# EAGLE board big (EAGLE 7.2.0), part 1 of 2
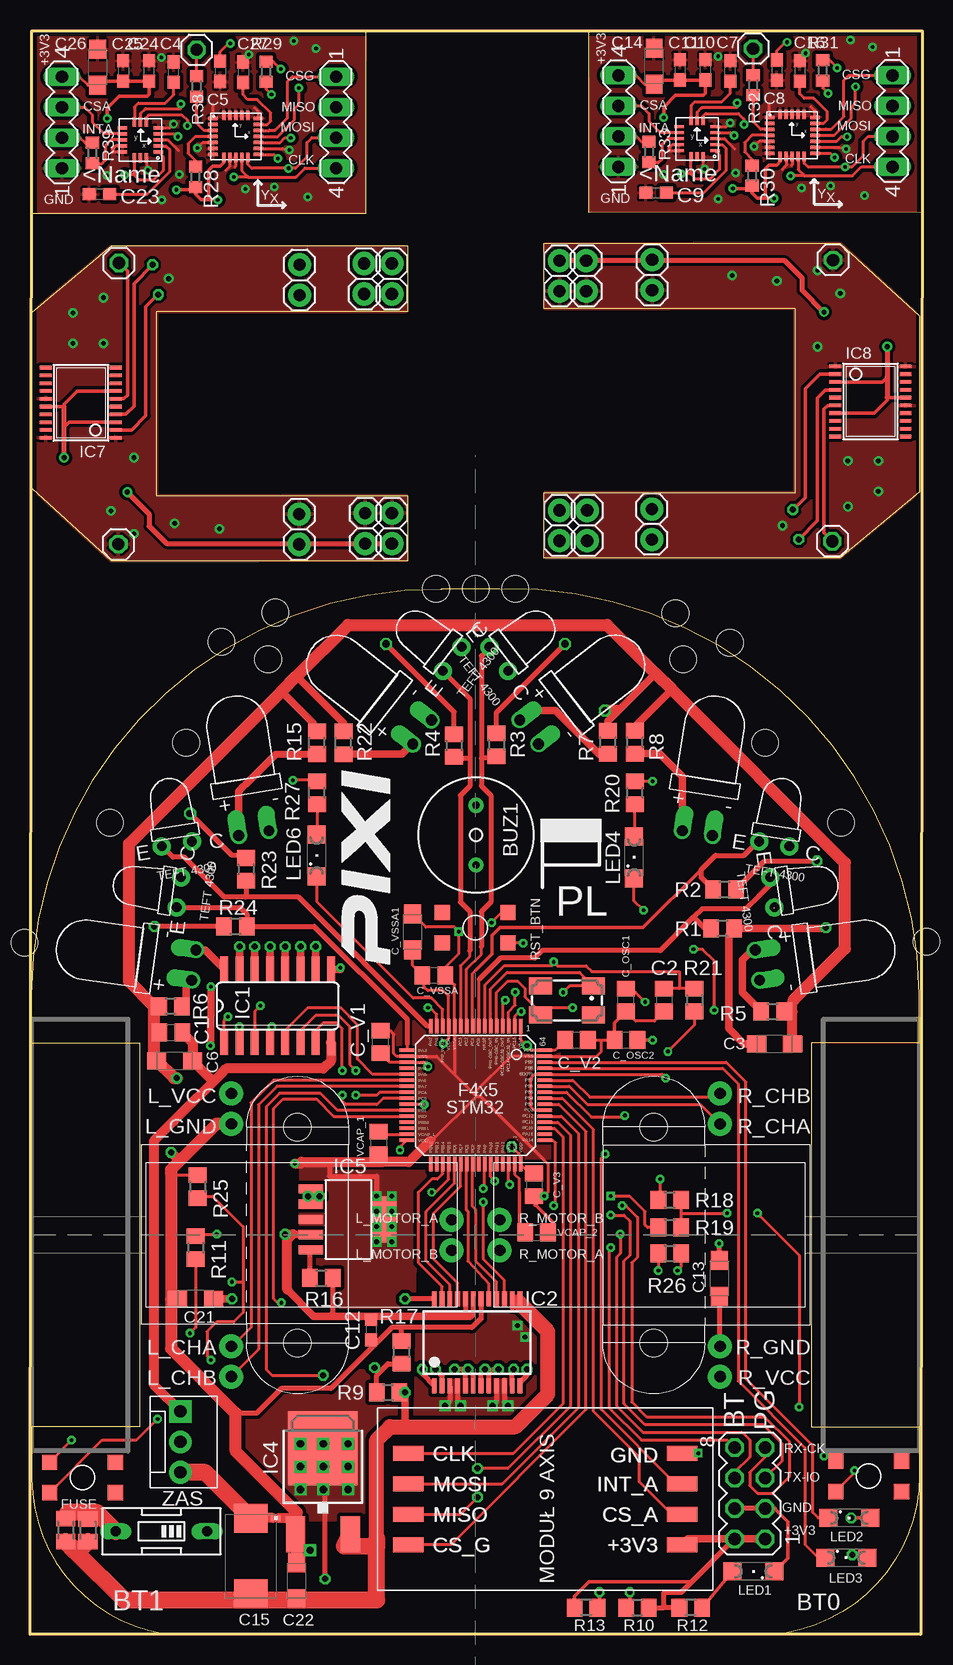
[diagram p0: board, top side]
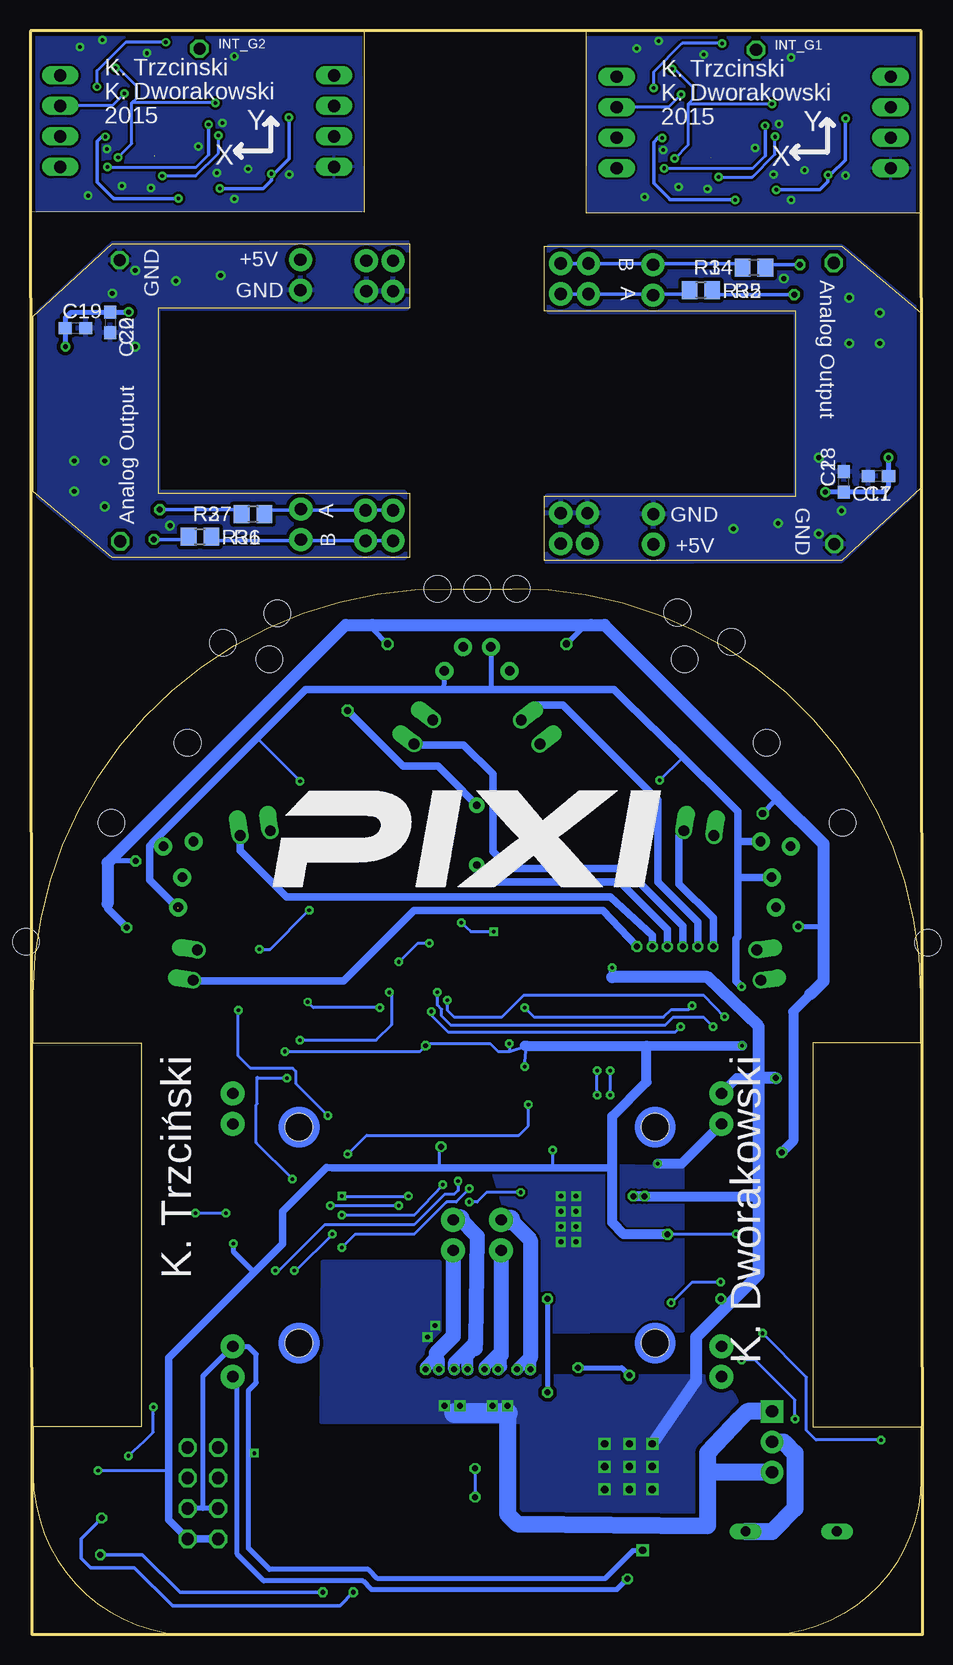
[diagram p1: board, bottom side, seen from below]

Size 74.43 x 133.79 mm. Coordinates in mm from the lower left corner, seen from the top.
Outline: 13.55,0 60.65,0
Outline: 0.15,110.21 0.15,95.6
Outline: 28.03,133.69 0.17,133.69
Outline: 74.17,95.33 74.17,109.93
Outline: 74.43,133.79 46.57,133.79
Outline: 0,0.05 0.13,133.71 74.4,133.71 74.27,0.05 0,0.05
Copper layers (1*16): Top 0.035mm / dielectric 1.5mm / Bottom 0.035mm
Design rules "default *": minimum track width 8mil, minimum drill 0.3mm, track to track 8mil, track to pad 8mil, pad to pad 7mil, via to via 8mil, smd to smd 0mil, copper to edge 12mil, drill to drill 8mil, minimum pad ring 10mil, minimum via ring 8mil, stop-mask expansion 4mil, vias tented up to drill 0mil, thermal gap 8mil
Holes 2.2 mm at 19.85,81.34 13.02,74.36 6.67,67.69 54.46,81.34 61.28,74.36 67.63,67.69 20.45,85.22 15.95,82.8 -0.45,57.7 53.81,85.15 58.35,82.7 74.75,57.8 37.15,87.2 33.85,87.2 40.45,87.2
Milling: 33 lines

## Footprints (pad centres in the part's own frame; a part is rotated, then mirrored left to right if it is on the bottom)
7914G = smd 1.27 x 1.27: 1 0,0; 2 0,5.486; 3 2.54,0; 4 2.54,5.486
BUZZER-9.5MM = drill 0.6 pad 1.27: + -2.481,0; - 2.499,0
C0805 = smd 1.3 x 1.5: 1 -0.95,0; 2 0.95,0
SMC_A = smd 1.6 x 1.4: + -1.5,0; - 1.5,0
C0603 = smd 1.1 x 1: 1 -0.85,0; 2 0.85,0
SMC_D = smd 2.4 x 2.8: + -3.15,0; - 3.15,0
SFH4545-C = drill 0.9 offset: ANODA -1.27,-0.76; KATODA 1.27,-0.76
M2012 = smd 1.3 x 1.6: 1 -0.95,0; 2 0.95,0
SO16 = smd 0.66 x 2.032: 1 -4.445,-3.073; 2 -3.175,-3.073; 3 -1.905,-3.073; 4 -0.635,-3.073; 5 0.635,-3.073; 6 1.905,-3.073; 7 3.175,-3.073; 8 4.445,-3.073; 9 4.445,3.073; 10 3.175,3.073; 11 1.905,3.073; 12 0.635,3.073; 13 -0.635,3.073; 14 -1.905,3.073; 15 -3.175,3.073; 16 -4.445,3.073
SSOP24 = smd 0.4 x 1.25: 1 -3.575,-3.625; 2 -2.925,-3.625; 3 -2.275,-3.625; 4 -1.625,-3.625; 5 -0.975,-3.625; 6 -0.325,-3.625; 7 0.325,-3.625; 8 0.975,-3.625; 9 1.625,-3.625; 10 2.275,-3.625; 11 2.925,-3.625; 12 3.575,-3.625; 13 3.575,3.625; 14 2.925,3.625; 15 2.275,3.625; 16 1.625,3.625; 17 0.975,3.625; 18 0.325,3.625; 19 -0.325,3.625; 20 -0.975,3.625; 21 -1.625,3.625; 22 -2.275,3.625; 23 -2.925,3.625; 24 -3.575,3.625
QFN24-4X4 = smd 0.8 x 0.3: GND1 -1.85,1.5; GND2 -1.85,-0.5; GND3 1.95,-1; GND4 1.95,1.5; INT1 -1.85,0.5; PWR_CTRL -1.85,1; RGND -1.85,-1; RGND1 -1.85,-1.5; RST_B -1.85,0; SA0/MISO 1.95,-1.5; SPI_CS_B 1.95,0.5; VDD 1.95,-0.5; VDDIO 1.95,1; VREGD 1.95,0 | smd 0.3 x 0.8: I2C_B/SPI -0.95,-1.75; RGND2 -0.45,-1.75; RGND3 0.05,-1.75; RGND4 1.05,1.75; RGND5 0.55,1.75; RGND6 0.05,1.75; RGND7 -0.45,1.75; RGND8 -0.95,1.75; SCL/SCLK 0.55,-1.75; SDA/MOSI 1.05,-1.75
DPACK = smd 1.6 x 3: 1 -2.28,-4.8; 3 2.28,-4.8 | smd 5.8 x 6.2: 4 0,2.38
SOT223-5 = smd 0.762 x 2.032: GND 0.095,-3.365; PWRGD 2.635,-3.365; SHDN -2.445,-3.365; VIN -1.175,-3.365; VOUT 1.365,-3.365 | smd 3.81 x 2.007: GND_TAB 0.095,2.777
TSSOP20 = smd 0.305 x 0.991: A -2.275,-2.918; AO 0.325,-2.918; B -0.975,-2.918; INDEX 1.625,-2.918; NC 2.275,-2.918; NC1 2.925,-2.918; NC2 2.925,2.918; TEST -0.325,-2.918; TEST1 2.275,2.918; TEST2 1.625,2.918; TEST3 0.975,2.918; TEST4 -0.975,2.918; TEST5 -1.625,2.918; TEST6 -2.275,2.918; TEST_GND 0.325,2.918; VDD 0.975,-2.918; VDDA -0.325,2.918; VDDP -1.625,-2.918; VSS -2.925,-2.918; ZPZ -2.925,2.918
1X01 = drill 1.016 octagon: 1 0,0
MOLEX-1X3 = drill 1.016 pad 1.88 square: 1 0,0 | drill 1.016 pad 1.88: 2 2.54,0; 3 5.08,0
PINHD_1X2_ROUND = drill 1.016 pad 1.93: 1 -2.54,0; 2 0,0
SML1206 = smd 1.5 x 1.5: A 1.75,0; C -1.75,0
TEFT4300 = drill 0.8 pad 1.5: C 1.27,-1.77; E -1.27,-1.77
CTS406 = smd 1.9 x 1.4: 1 -2.2,-1.2; 2 2.2,-1.2; 3 2.2,1.2; 4 -2.2,1.2
R0805 = smd 1.3 x 1.5: 1 -0.95,0; 2 0.95,0
R0201 = smd 0.28 x 0.43: 1 -0.255,0; 2 0.255,0
R0603 = smd 1 x 1.1: 1 -0.85,0; 2 0.85,0
MA04-1 = drill 1.016 long: 1 -3.81,0; 2 -1.27,0; 3 1.27,0; 4 3.81,0
MA04-2 = drill 1.016 octagon: 1 -3.81,-1.27; 2 -3.81,1.27; 3 -1.27,-1.27; 4 -1.27,1.27; 5 1.27,-1.27; 6 1.27,1.27; 7 3.81,-1.27; 8 3.81,1.27
9AXIS_SENSOR_MODULE = smd 2.54 x 1.27: P$1 -11.43,3.81; P$2 -11.43,1.27; P$3 -11.43,-1.27; P$4 -11.43,-3.81; P$5 11.43,-3.81; P$6 11.43,-1.27; P$7 11.43,1.27; P$8 11.43,3.81
QFN16-5X3 = smd 0.77 x 0.27: P$1 -1.497,0.989; P$2 -1.497,0.489; P$3 -1.497,-0.011; P$4 -1.497,-0.511; P$5 -1.497,-1.011; P$9 1.503,-1.011; P$10 1.503,-0.511; P$11 1.503,-0.011; P$12 1.503,0.489; P$13 1.503,0.989 | smd 0.27 x 0.77: P$6 -0.497,-1.511; P$7 0.003,-1.511; P$8 0.503,-1.511; P$14 0.503,1.489; P$15 0.003,1.489; P$16 -0.497,1.489
MOTOR_MOUNT = drill 0.95 pad 2: L_CHA -20.375,-10.1; L_CHB -20.375,-12.64; L_GND -20.375,8.44; L_MOTOR_A -2,0.44; L_MOTOR_B -2,-2.1; L_VCC -20.375,10.98; R_CHA 20.375,8.44; R_CHB 20.375,10.98; R_GND 20.375,-10.1; R_MOTOR_A 2,-2.1; R_MOTOR_B 2,0.44; R_VCC 20.375,-12.64 | hole 2.286: 14.85,8.17; 14.85,-9.83; -14.85,-9.83; -14.85,8.17
STM32F4-LQFP64 = smd 1.2 x 0.3: BOOT0 -5.75,-1.75; PA3 5.75,-3.75; PA4 5.75,-2.25; PA5 5.75,-1.75; PA6 5.75,-1.25; PA7 5.75,-0.75; PA14 -5.75,3.75; PA15 -5.75,3.25; PB0 5.75,0.75; PB1 5.75,1.25; PB2 5.75,1.75; PB3 -5.75,0.75; PB4 -5.75,0.25; PB5 -5.75,-0.25; PB6 -5.75,-0.75; PB7 -5.75,-1.25; PB8 -5.75,-2.25; PB9 -5.75,-2.75; PB10 5.75,2.25; PB11 5.75,2.75; PC4 5.75,-0.25; PC5 5.75,0.25; PC10 -5.75,2.75; PC11 -5.75,2.25; PC12 -5.75,1.75; PD2 -5.75,1.25; VCAP_1 5.75,3.25; VDD_0 5.75,-2.75; VDD_1 5.75,3.75; VDD_3 -5.75,-3.75; VSS_0 5.75,-3.25; VSS_1 -5.75,-3.25 | smd 0.3 x 1.2: NRST -0.75,-5.75; PA0_WKUP 2.75,-5.75; PA1 3.25,-5.75; PA2 3.75,-5.75; PA8 -0.25,5.75; PA9 -0.75,5.75; PA10 -1.25,5.75; PA11 -1.75,5.75; PA12 -2.25,5.75; PA13 -2.75,5.75; PB12 3.75,5.75; PB13 3.25,5.75; PB14 2.75,5.75; PB15 2.25,5.75; PC0 -0.25,-5.75; PC1 0.25,-5.75; PC2 0.75,-5.75; PC3 1.25,-5.75; PC6 1.75,5.75; PC7 1.25,5.75; PC8 0.75,5.75; PC9 0.25,5.75; PC13 -3.25,-5.75; PC14 -2.75,-5.75; PC15 -2.25,-5.75; PH0 -1.75,-5.75; PH1 -1.25,-5.75; VBAT -3.75,-5.75; VCAP_2 -3.25,5.75; VDD_2 -3.75,5.75; VDDA 2.25,-5.75; VSSA 1.75,-5.75
EDG-01 = drill 0.813 long: 1 0,-3.81; 2 0,3.81

## Placement (x,y rotation side)
BT0  TACTILE-SWITCH-7914G  [7914G]  67.18,14.5 270 top
BT1  TACTILE-SWITCH-7914G  [7914G]  1.64,14.4 270 top
BUZ1  BUZZER-9.5MM-3V?  [BUZZER-9.5MM]  37.19,66.68 270 top
C1  100n  [C0805]  11.75,50.23 0 top
C2  100n  [C0805]  52.87,52.93 270 top
C3  tant-a-4,7u  [SMC_A]  62.08,49.27 180 top
C4  100n  [C0603]  11.99,130.28 90 top
C5  100n  [C0603]  15.87,130.34 270 top
C6  tant-a-10u  [SMC_A]  12.07,47.85 0 top
C7  100n  [C0603]  58.39,130.38 90 top
C8  100n  [C0603]  62.27,130.44 270 top
C9  100n  [C0603]  52.2,120.21 0 top
C10  100n  [C0603]  56.33,130.47 90 top
C11  100n  [C0603]  54.19,130.47 270 top
C12  100n  [C0603]  28.42,25.46 270 top
C13  tant-a-10u  [SMC_A]  57.49,29.72 270 top
C14  tant-a-4u7  [SMC_A]  52.04,130.77 90 top
C15  tant-d-220u  [SMC_D]  18.42,6.57 90 top
C16  100n  [C0603]  64.18,130.37 270 top
C17  10u  [C0603]  3.69,96.58 180 bottom
C18  100n  [C0603]  6.57,96.12 90 bottom
C19  10u  [C0603]  70.63,108.95 0 bottom
C20  100n  [C0603]  67.75,109.41 270 bottom
C21  tant-a-4,7u  [SMC_A]  13.82,28 180 top
C22  tant-a-10u  [SMC_A]  22.23,4.51 90 top
C23  100n  [C0603]  5.8,120.11 0 top
C24  100n  [C0603]  9.93,130.37 90 top
C25  100n  [C0603]  7.79,130.37 270 top
C26  tant-a-4u7  [SMC_A]  5.64,130.67 90 top
C27  100n  [C0603]  17.78,130.27 270 top
C_OSC1  27p  [C0805]  49.7,52.93 90 top
C_OSC2  27p  [C0805]  49.7,49.59 0 top
C_V1  100n  [C0805]  29.22,49.43 90 top
C_V2  100n  [C0805]  45.57,49.59 0 top
C_V3  100n  [C0805]  42.04,37.53 270 top
C_VSSA  100n  [C0805]  33.66,54.99 0 top
C_VSSA1  tant-a-4,7u  [SMC_A]  31.9,58.61 90 top
D1  SFH4545-C  [SFH4545-C]  61.4,55.94 278 top
D2  SFH4545-C  [SFH4545-C]  12.9,55.95 82 top
D3  SFH4545-C  [SFH4545-C]  42.22,75.74 308 top
D4  SFH4545-C  [SFH4545-C]  55.77,67.58 351 top
D5  SFH4545-C  [SFH4545-C]  18.54,67.58 9 top
D6  SFH4545-C  [SFH4545-C]  32.09,75.73 52 top
FUSE  [M2012]  2.97,8.74 90 top
FUSE1  [M2012]  4.83,8.73 90 top
IC1  ULN2003AD  [SO16]  20.64,52.45 0 top
IC2  TB6612FNG  [SSOP24]  37.28,24.38 0 top
IC3  FXAS21002C  [QFN24-4X4]  17.11,124.91 0 top
IC4  LD117ADT50TR  [DPACK]  24.42,13.18 0 top
IC5  MCP1825  [SOT223-5]  26.77,34.73 270 top
IC6  FXAS21002C  [QFN24-4X4]  63.51,125.01 0 top
IC7  [TSSOP20]  4.24,102.72 90 top
IC8  [TSSOP20]  70.08,102.82 270 top
INT_G1  [1X01]  13.89,132.13 0 top
INT_G2  [1X01]  60.29,132.23 0 top
JP1  [MOLEX-1X3]  12.55,18.64 270 top
JP2  PINHD_1X2_ROUND  [PINHD_1X2_ROUND]  44.15,112.01 270 top
JP3  PINHD_1X2_ROUND  [PINHD_1X2_ROUND]  44.15,91.21 270 top
JP4  [1X01]  66.9,91.16 270 top
JP5  PINHD_1X2_ROUND  [PINHD_1X2_ROUND]  51.88,112.09 270 top
JP6  PINHD_1X2_ROUND  [PINHD_1X2_ROUND]  51.84,91.31 270 top
JP7  [1X01]  66.95,114.6 270 top
JP8  PINHD_1X2_ROUND  [PINHD_1X2_ROUND]  46.46,91.21 270 top
JP9  PINHD_1X2_ROUND  [PINHD_1X2_ROUND]  46.38,112.01 270 top
JP10  PINHD_1X2_ROUND  [PINHD_1X2_ROUND]  30.17,93.52 90 top
JP11  PINHD_1X2_ROUND  [PINHD_1X2_ROUND]  30.17,114.32 90 top
JP12  [1X01]  7.42,114.38 90 top
JP13  PINHD_1X2_ROUND  [PINHD_1X2_ROUND]  22.44,93.45 90 top
JP14  PINHD_1X2_ROUND  [PINHD_1X2_ROUND]  22.48,114.22 90 top
JP15  [1X01]  7.37,90.93 90 top
JP16  PINHD_1X2_ROUND  [PINHD_1X2_ROUND]  27.86,114.32 90 top
JP17  PINHD_1X2_ROUND  [PINHD_1X2_ROUND]  27.94,93.52 90 top
LED1  red  [SML1206]  60.33,5.3 180 top
LED2  green  [SML1206]  68.3,9.75 0 top
LED3  yellow  [SML1206]  68.05,6.44 0 top
LED4  green  [SML1206]  50.37,64.81 90 top
LED6  yellow  [SML1206]  23.91,64.97 90 top
Q1  TEFT4300  [TEFT4300]  63.65,62.15 278 top
Q2  TEFT4300  [TEFT4300]  62.33,67.69 351 top
Q3  TEFT4300  [TEFT4300]  40.49,82.45 308 top
Q4  TEFT4300  [TEFT4300]  33.82,82.45 52 top
Q5  TEFT4300  [TEFT4300]  11.98,67.69 9 top
Q6  TEFT4300  [TEFT4300]  10.65,62.15 82 top
Q7  8MHz  [CTS406]  44.77,52.89 180 top
R1  [R0805]  57.75,58.88 180 top
R2  [R0805]  57.91,62.13 180 top
R3  [R0805]  38.9,74.2 270 top
R4  [R0805]  35.36,74.14 270 top
R5  [R0805]  61.92,51.97 0 top
R6  [R0805]  11.72,52.4 180 top
R7  [R0805]  48.18,74.41 90 top
R8  [R0805]  50.44,74.41 90 top
R9  [R0805]  29.85,20.22 0 top
R10  10K  [R0805]  50.65,2.28 0 top
R11  10K  [R0805]  13.82,32.29 270 top
R12  10K  [R0805]  55.09,2.28 180 top
R13  10K  [R0805]  46.36,2.28 180 top
R14  pcb  [R0201]  20.49,9.75 180 top
R15  [R0805]  23.92,74.38 90 top
R16  10K  [R0805]  24.3,29.75 0 top
R17  [R0805]  30.96,23.56 270 top
R18  [R0805]  53.35,36.26 0 top
R19  [R0805]  53.35,33.97 0 top
R20  10K  [R0805]  50.44,70.2 90 top
R21  10k...47k  [R0805]  55.41,52.93 270 top
R22  [R0805]  26.13,74.38 90 top
R23  [R0805]  18.01,63.82 270 top
R24  [R0805]  17.12,59.07 0 top
R25  [R0805]  13.98,37.37 270 top
R26  [R0805]  53.35,31.81 0 top
R27  10K  [R0805]  23.92,70.2 90 top
R28  [R0603]  13.81,121.54 270 top
R29  [R0603]  19.69,130.3 90 top
R30  [R0603]  60.21,121.64 270 top
R31  [R0603]  66.09,130.4 90 top
R32  [R0603]  60.29,129.19 90 top
R33  [R0603]  51.61,123.62 90 top
R34  [R0805]  18.49,112.11 0 bottom
R35  [R0805]  14.07,113.97 180 bottom
R36  [R0805]  55.83,93.42 180 bottom
R37  [R0805]  60.25,91.57 0 bottom
R38  [R0603]  13.89,129.09 90 top
R39  [R0603]  5.21,123.52 90 top
RST_BTN  TACTILE-SWITCH-7914G  [7914G]  39.85,57.69 90 top
SPI1  [MA04-1]  25.52,126.09 270 top
SPI2  [MA04-1]  71.92,126.19 270 top
SV1  [MA04-2]  60.01,11.81 90 top
U$1  9AXIS_MODULE  [9AXIS_SENSOR_MODULE]  42.96,11.33 180 top
U$2  FXOS8700CQR1  [QFN16-5X3]  55.62,124.71 180 top
U$3  FXOS8700CQR1  [QFN16-5X3]  9.22,124.61 180 top
U$5  MOTOR_MOUNT  [MOTOR_MOUNT]  37.15,34.16 0 top
U$6  STM32F4X5  [STM32F4-LQFP64]  37.15,44.99 180 top
VCAP_1  2,2u  [C0805]  29.06,41.02 270 top
VCAP_2  2,2u  [C0805]  42.23,33.56 0 top
ZAS  [EDG-01]  10.96,8.63 90 top
ZAS1  [MA04-1]  49.07,126.19 90 top
ZAS2  [MA04-1]  2.67,126.09 90 top

## Library data of the parts
BT0 BT1 RST_BTN = GeekAmmo
BUZ1 D1-D6 IC2 IC3 IC5-IC8 JP2 JP3 JP5 JP6 JP8-JP11 JP13 JP14 JP16 JP17 U$1-U$3 U$5 U$6 = _microMouse
C1-C27 C_OSC1 C_OSC2 C_V1-C_V3 C_VSSA C_VSSA1 R1-R8 R15 R18 R19 R21-R26 R28-R39 VCAP_1 VCAP_2 = rcl
FUSE FUSE1 R9-R14 R16 R17 R20 R27 = resistor
IC1 = uln-udn
IC4 = v-reg
INT_G1 INT_G2 JP4 JP7 JP12 JP15 = pinhead
JP1 = SparkFun-Connectors
LED1-LED4 LED6 = led
Q1-Q6 = _MM
Q7 = crystal; OC_FARNELL: unknown; OC_NEWARK: unknown
SPI1 SPI2 SV1 ZAS1 ZAS2 = con-lstb; OC_FARNELL: unknown; OC_NEWARK: unknown
ZAS = special

## Nets
+3V1: C10.1 C11.2 C14.+ IC6.I2C_B/SPI IC6.VDD R30.2 U$2.P$1 U$2.P$14 ZAS1.4
+3V2: C24.1 C25.2 C26.+ IC3.I2C_B/SPI IC3.VDD R28.2 U$3.P$1 U$3.P$14 ZAS2.4
+3V3: BT0.3 C12.1 C13.+ C_V1.1 C_V2.1 C_V3.1 C_VSSA1.+ C_VSSA.1 IC2.19 IC2.20 IC5.VOUT Q1.C Q2.C Q3.C Q4.C Q5.C Q6.C R10.2 R11.1 R12.2 R13.2 R16.2 R20.2 R21.2 R27.2 SV1.1 SV1.2 U$1.P$1 U$6.VBAT U$6.VDD_0 U$6.VDD_1 U$6.VDD_2 U$6.VDD_3 U$6.VDDA
+5V: BUZ1.+ C1.1 C3.+ C6.+ C21.+ IC1.9 IC4.4 IC5.SHDN IC5.VIN R5.2 R6.2 R7.2 R8.2 R15.2 R22.2 U$5.L_VCC U$5.R_VCC
+7V: C15.+ C22.+ FUSE1.1 FUSE.1 IC2.13 IC2.14 IC2.24 IC4.3 R9.2
ADC_L: Q2.E R2.2 U$6.PC1
ADC_LF: Q1.E R1.2 U$6.PC0
ADC_PA2: Q5.E R23.2 U$6.PA2
ADC_PA3: Q6.E R24.2 U$6.PA3
ADC_R: Q3.E R3.2 U$6.PC2
ADC_RF: Q4.E R4.2 U$6.PC3
ADC_VBAT: R9.1 R17.2 U$6.PB1
AO1: IC7.AO JP12.1
AO2: IC8.AO JP4.1
BOOT0: R18.1 U$6.BOOT0 U$6.PD2
BT_RXD: SV1.8 U$6.PA9
BT_TXD: R26.2 U$6.PA10
BTN: BT1.3 R25.2 U$6.PB2
BUZZER: IC1.7 U$6.PC5
CHA1: IC7.A R34.2
CHA2: IC8.A R36.2
CHB1: IC7.B R35.1
CHB2: IC8.B R37.1
CS_A: U$1.P$2 U$6.PB4
CS_A1: U$2.P$10 ZAS1.3
CS_A2: U$3.P$10 ZAS2.3
CS_G: U$1.P$8 U$6.PB3
CS_G1: IC6.SPI_CS_B SPI2.1
CS_G2: IC3.SPI_CS_B SPI1.1
D_L: IC1.3 U$6.PA1
D_LF: IC1.1 U$6.PC15
D_LL: IC1.4 U$6.PC13
D_R: IC1.5 U$6.PA5
D_RF: IC1.6 U$6.PC4
D_RR: IC1.2 U$6.PC14
ENCL_A: U$5.L_CHA U$6.PA6
ENCL_B: U$5.L_CHB U$6.PA7
ENCR_A: U$5.R_CHA U$6.PB6
ENCR_B: U$5.R_CHB U$6.PB7
GND: C2.2 C3.- C12.2 C13.- C21.- C22.- C_OSC1.1 C_OSC2.1 C_V1.2 C_V2.2 C_V3.2 C_VSSA1.- C_VSSA.2 IC2.18 IC4.1 IC5.GND IC5.GND_TAB LED1.C R1.1 R2.1 R3.1 R4.1 R14.1 R17.1 R19.1 R23.1 R24.1 R25.1 RST_BTN.3 SV1.3 SV1.4 U$1.P$4 U$5.L_GND U$5.R_GND U$6.VSS_0 U$6.VSS_1 U$6.VSSA VCAP_1.2 VCAP_2.2
GND1: C4.2 C5.2 C23.1 C24.2 C25.1 C26.- C27.1 IC3.GND1 IC3.GND2 IC3.GND3 IC3.GND4 IC3.RGND IC3.RGND1 IC3.RGND2 IC3.RGND3 IC3.RGND4 IC3.RGND5 IC3.RGND6 IC3.RGND7 IC3.RGND8 U$3.P$3 U$3.P$5 U$3.P$12 U$3.P$13 U$3.P$16 ZAS2.1
GND3: C17.2 C18.2 IC7.TEST_GND IC7.VSS IC7.ZPZ JP10.2 JP13.2 JP15.1 JP17.2
GND4: C19.2 C20.2 IC8.TEST_GND IC8.VSS IC8.ZPZ JP2.2 JP5.2 JP7.1 JP9.2
GND5: C7.2 C8.2 C9.1 C10.2 C11.1 C14.- C16.1 IC6.GND1 IC6.GND2 IC6.GND3 IC6.GND4 IC6.RGND IC6.RGND1 IC6.RGND2 IC6.RGND3 IC6.RGND4 IC6.RGND5 IC6.RGND6 IC6.RGND7 IC6.RGND8 U$2.P$3 U$2.P$5 U$2.P$12 U$2.P$13 U$2.P$16 ZAS1.1
GNDA: C1.2 C6.- C15.- IC1.8 IC2.3 IC2.4 IC2.9 IC2.10 JP1.1 JP1.3 R14.2
INT_A: U$1.P$3 U$6.PB0
INT_A1: R33.1 U$2.P$11
INT_A2: R39.1 U$3.P$11
LED1: LED2.C U$6.PB9
LED2: LED3.C U$6.PB8
LED3: LED4.C U$6.PB5
LED5: LED6.C U$6.PA0_WKUP
LED6: U$6.PB11
MISO: U$1.P$7 U$6.PC11
MISO1: IC6.SA0/MISO R31.2 U$2.P$7
MISO2: IC3.SA0/MISO R29.2 U$3.P$7
ML_IN1: IC2.22 U$6.PC6
ML_IN2: IC2.21 U$6.PC7
ML_PWM: IC2.23 U$6.PB14
MOSI: U$1.P$6 U$6.PC12
MOSI1: IC6.SDA/MOSI SPI2.3 U$2.P$6
MOSI2: IC3.SDA/MOSI SPI1.3 U$3.P$6
MR_IN1: IC2.17 U$6.PC8
MR_IN2: IC2.16 U$6.PC9
MR_PWM: IC2.15 U$6.PB15
N$1: IC5.PWRGD R16.1
N$2: D5.KATODA IC1.15
N$3: D5.ANODA R15.1
N$4: D1.ANODA R5.1
N$5: IC2.7 IC2.8 U$5.R_MOTOR_B
N$6: IC2.11 IC2.12 U$5.R_MOTOR_A
N$7: IC2.1 IC2.2 U$5.L_MOTOR_A
N$8: LED3.A R10.1
N$9: JP1.2 ZAS.1
N$10: D2.ANODA R6.1
N$11: D3.ANODA R7.1
N$12: D4.ANODA R8.1
N$13: D2.KATODA IC1.16
N$14: D1.KATODA IC1.10
N$15: D3.KATODA IC1.13
N$16: D4.KATODA IC1.11
N$17: LED1.A R12.1
N$18: IC2.5 IC2.6 U$5.L_MOTOR_B
N$19: BUZ1.- IC1.12
N$20: D6.ANODA R22.1
N$21: LED2.A R13.1
N$22: LED4.A R20.1
N$23: BT0.1 R18.2 R19.2
N$24: FUSE1.2 FUSE.2 ZAS.2
N$25: C4.1 U$3.P$8
N$26: R26.1 SV1.6
N$27: C23.2 U$3.P$2
N$28: C7.1 U$2.P$8
N$29: BT1.1 R11.2
N$30: C9.2 U$2.P$2
N$31: LED6.A R27.1
N$32: C8.1 IC6.VREGD
N$33: D6.KATODA IC1.14
N$34: IC6.PWR_CTRL
N$35: IC6.RST_B R30.1
N$36: R31.1 SPI2.2
N$37: INT_G2.1 R32.2
N$38: IC6.INT1 R32.1
N$39: R33.2 ZAS1.2
N$40: JP11.1 R34.1
N$41: JP11.2 R35.2
N$42: JP3.1 R36.1
N$43: JP3.2 R37.2
N$44: C5.1 IC3.VREGD
N$45: IC3.PWR_CTRL
N$46: IC3.RST_B R28.1
N$47: R29.1 SPI1.2
N$48: INT_G1.1 R38.2
N$49: IC3.INT1 R38.1
N$50: R39.2 ZAS2.2
OSC_IN: C_OSC1.2 Q7.3 U$6.PH0
OSC_OUT: C_OSC2.2 Q7.1 U$6.PH1
RST: C2.1 R21.1 RST_BTN.1 U$6.NRST
SCLK: U$1.P$5 U$6.PC10
SCLK1: IC6.SCL/SCLK SPI2.4 U$2.P$4
SCLK2: IC3.SCL/SCLK SPI1.4 U$3.P$4
SWCLK: SV1.7 U$6.PA14
SWDIO: SV1.5 U$6.PA13
VCAP_1: U$6.VCAP_1 VCAP_1.1
VCAP_2: U$6.VCAP_2 VCAP_2.1
VCC1: C17.1 C18.1 IC7.VDD IC7.VDDA IC7.VDDP JP10.1
VCC2: C19.1 C20.1 IC8.VDD IC8.VDDA IC8.VDDP JP2.1
VDDIO1: C27.2 IC3.VDDIO
VDDIO2: C16.2 IC6.VDDIO

## Tracks (layer width: path | path; a pad name or v marks a point on that pad's centre or on a via)
+3V1  (via drill 0.3)
  Top 0.254: IC6.VDD arc-45 65.5,124.51 67.27,124.51 67.65,124.89 v68.13,124.89 | U$2.P$1 arc-45 U$2.P$1 57.46,123.38 arc-45 57.49,123.31 57.49,122.17 56.72,121.4 arc-45 56.65,121.36 55.52,121.36 55.15,121.75 arc-45 55.12,121.82 | 55.12,121.82 arc-45 55.09,121.81 v54.29,121.81 | 55.12,121.82 U$2.P$14 | 52.84,126.54 v52.84,126.51 | IC6.I2C_B/SPI 62.55,122.83 | ZAS1.4 50.52,130 51.24,129.27 C14.+
  Top 0.305: v62.05,119.74 arc45 62.02,119.75 61.3,119.75 | 61.3,119.75 60.66,119.75 60.24,120.18 arc-45 60.21,120.25 R30.2 60.02,120.6 arc-45 60.06,120.57 v58.6,120.57 | 62.55,122.83 62.25,122.53 61.62,122.53 61.3,122.21 61.3,119.75 | C14.+ 52.24,129.62 C11.2 C10.1 56.33,128.53 56.16,128.35 53.83,128.35 52.84,127.36 52.84,126.54
  Bottom 0.254: 54.09,121.81 v54.29,121.81
  Bottom 0.305: v62.05,119.74 67.4,119.74 arc45 67.48,119.77 68.82,121.11 68.82,124.54 68.46,124.89 v68.13,124.89 | v58.6,120.57 54.99,120.57 54.32,121.24 arc-45 54.29,121.31 v54.29,121.81 | 54.09,121.81 52.84,123.05 v52.84,126.51
+3V2  (via drill 0.3)
  Top 0.254: IC3.VDD arc-45 19.1,124.41 20.87,124.41 21.25,124.79 v21.73,124.79 | U$3.P$1 arc-45 U$3.P$1 11.06,123.28 arc-45 11.09,123.21 11.09,122.07 10.32,121.3 arc-45 10.25,121.26 9.12,121.26 8.75,121.65 arc-45 8.72,121.72 | 8.72,121.72 arc-45 8.69,121.71 v7.89,121.71 | 8.72,121.72 U$3.P$14 | 6.44,126.44 v6.44,126.41 | IC3.I2C_B/SPI 16.16,122.73 | ZAS2.4 4.12,129.9 4.84,129.17 C26.+
  Top 0.305: v15.65,119.64 arc45 15.62,119.65 14.9,119.65 | 14.9,119.65 14.26,119.65 13.84,120.08 arc-45 13.81,120.15 R28.2 13.62,120.5 arc-45 13.66,120.47 v12.2,120.47 | 16.16,122.73 15.85,122.43 15.22,122.43 14.9,122.11 14.9,119.65 | C26.+ 5.85,129.52 C25.2 C24.1 9.93,128.42 9.75,128.25 7.43,128.25 6.44,127.26 6.44,126.44
  Bottom 0.254: 7.69,121.71 v7.89,121.71
  Bottom 0.305: v15.65,119.64 21,119.64 arc45 21.08,119.67 22.42,121.01 22.42,124.44 22.06,124.79 v21.73,124.79 | v12.2,120.47 8.59,120.47 7.92,121.14 arc-45 7.89,121.21 v7.89,121.71 | 7.69,121.71 6.44,122.95 v6.44,126.41
+3V3  (via drill 0.3, 0.4, 0.5)  (1 unrouted)
  Top 0.254: R11.1 13.82,33.4 v15.56,33.4 | v34.45,49.27 34.9,49.72 U$6.VDDA 34.9,53.27 34.45,53.72 33.18,53.72 32.87,54.04 32.87,54.83 C_VSSA.1 31.9,55.8 C_VSSA1.+ | v33.18,47.37 32.82,47.74 U$6.VDD_0 29.96,47.74 C_V1.1 | C_V2.1 43.76,48.74 U$6.VDD_3 41.82,48.74 v41.44,49.12 40.9,49.65 U$6.VBAT | v40.17,40.7 40.9,39.97 U$6.VDD_2 41.66,38.48 C_V3.1 | R21.2 55.41,50.86 v53.19,48.64 | R27.2 23.83,71.25 v21.91,71.25 | R20.2 50.45,71.17 v51.91,71.17 | U$6.VDD_1 30.85,40.69 v30.85,40.4 | BT0.3 68.75,13.53 v68.75,13.71
  Top 0.305: C12.1 28.42,26.41 28.26,26.57 | R13.2 45.41,3.24 46.6,4.43 55.17,4.43
  Top 0.406: IC2.20 36.31,26.84 36.2,26.73 36.84,26.73 36.96,26.85 IC2.19 | R16.2 25.24,26.89 24.93,26.57 | R10.2 52.87,2.28 | SV1.2 55.17,4.43 54.3,3.55 52.87,3.56 52.87,2.44 52.87,2.28 | R12.2 52.87,2.28 | C_VSSA.1 32.23,55.47 | C13.+ 57.47,31.23 v57.47,32.61
  Top 0.61: 36.84,26.73 36.68,26.57 28.26,26.57 24.93,26.57 23.66,26.57 21.44,28.8 | v15.05,49.12 v15.09,54.04 | SV1.1 SV1.2 54.87,8 U$1.P$1 | 21.91,33.4 23.38,33.4 IC5.VOUT | 21.63,33.37 21.63,33.11 21.6,33.08
  Top 0.813: 21.63,33.37 v21.28,33.4 | 21.44,28.8 21.44,32.92 21.6,33.08 21.91,33.4
  Bottom 0.254: 34.45,48.64 35.41,48.64 36.04,49.27 41.28,49.27 v41.44,49.12 41.92,48.64 v53.19,48.64 | 34.45,48.64 33.03,49.12 v33.18,47.37 | v15.56,33.4 v21.28,33.4 | v34.45,49.27 34.45,48.64 | v40.17,40.7 40.33,40.54 40.33,38.95 | v68.75,13.71 62.87,13.71 | v21.91,71.25 20,73.16 20,73.17 | v51.91,71.17 55.49,74.75 | v30.85,40.4 30.85,38.95
  Bottom 0.406: v57.47,32.61 57.47,31.97 55.73,30.22 | Q4.C 35.99,78.91 35.88,78.8 | Q3.C 39.95,78.8
  Bottom 0.61: SV1.2 SV1.1 62.87,9.59 62.87,13.71 62.87,23.08 55.73,30.22 53.35,32.61 53.35,35.3 49.7,38.96 49.22,38.95 40.33,38.95 30.85,38.95 25.89,38.95 25.88,38.96 | 62.08,60.55 64.46,62.93 64.46,65.78 64.14,66.1 | v15.09,54.04 15.56,54.51 15.56,58.01 15.4,58.16 15.4,62.93 | 15.4,62.93 15.4,65.94 | 15.4,65.94 15.4,68.64 16.2,69.44 20,73.17 20.13,73.29 24.77,77.85 25.72,78.8 35.88,78.8 39.95,78.8 51.44,78.8 55.49,74.75 64.14,66.1 | Q6.C 15.17,63.16 15.4,62.93 | Q5.C 15.21,66.14 15.4,65.94 | Q2.C 63.78,65.74 64.14,66.1
  Bottom 0.813: 33.18,49.12 33.03,49.12 23.02,49.12 | 23.02,49.12 v15.05,49.12 | v21.28,33.4 24.93,33.4 25.88,34.35 25.88,38.96 25.88,43.24 23.02,46.1 23.02,49.12
+5V  (via drill 0.3, 0.5, 0.6)
  Top 0.406: v24.61,4.67 24.61,13.87 v24.45,14.03
  Top 0.61: IC1.9 25.15,55.47 25.88,55.47 v25.88,55.62 | C21.+ v16.83,28 | C3.+ 63.51,49.27 | 49.22,77.21 52.16,80.15 | R22.2 26.13,76.01 22.23,79.91 | R15.2 23.59,76.01 20.96,78.64 | v47.95,77.06 48.11,77.21 49.22,77.21 | 53.5,78.8 50.44,75.73 R8.2 | R7.2 48.18,76.17 49.22,77.21
  Top 0.813: IC5.VIN 23.18,36.13 v23.18,36.58 | IC5.SHDN 24.01,36.58 v24.14,36.58 | C3.+ 63.58,51.97 | 63.58,51.97 63.58,52.84 63.66,52.93 64.62,53.88 | R5.2 63.58,51.97
  Top 1.016: v22.55,15.94 23.18,17.05 | v22.55,15.94 v24.45,15.94 | v22.55,14.03 v24.45,14.03 25.88,14.03 24.84,15.08 IC4.4 24.42,15.65 v22.55,15.94 | 63.66,52.93 67.95,57.21 67.95,64.36 53.5,78.8 52.16,80.15 48.11,84.2 26.52,84.2 22.23,79.91 20.96,78.64 8.26,65.94 8.26,54.51 10.32,52.45 10.32,52.29 | v12.23,46.42 12,46.42 C6.+ 10.32,48.09 10.32,50.23 | 10.32,52.29 10.32,50.23 | C1.1 10.32,50.23 | R6.2 10.43,52.4 10.32,52.29
  Bottom 0.406: U$5.R_VCC 57.16,21.15 57.16,6.73 54.93,4.51 46.68,4.51 45.97,3.8 25.48,3.8 v24.61,4.67
  Bottom 0.61: v25.88,55.62 25.88,54.83 | v16.83,28 16.67,28 16.28,27.45 | BUZ1.+ 38.65,70.68 40.42,72.45 43.34,72.45 v47.95,77.06
  Bottom 0.813: v24.14,36.58 v23.18,36.58 13.66,36.58 | U$5.L_VCC 15.5,46.42 13.66,46.42
  Bottom 1.016: 25.88,54.83 17.95,54.83 13.66,50.72 13.66,49.28 13.66,49.27 13.66,46.42 | v22.55,15.94 18.9,21.18 18.9,24.83 16.28,27.45 13.66,30.07 13.66,36.58 13.66,46.42 | v12.23,46.42 13.66,46.42
  other vias: 26.52,15.94 26.52,14.03 26.52,12.13 24.45,12.13 22.55,12.13
  pour Top (isolate 0.305, no thermals): 14.93,19.91 14.93,14.03 arc90 19.37,9.59 26.04,9.59 arc90 32.23,15.78 32.23,16.73 arc90 26.84,22.13 16.36,22.13 arc90 14.93,20.7
  pour Bottom (isolate 0.305): 15.56,11.65 arc90 19.53,7.68 30.65,7.68 arc90 35.41,12.45 35.41,18 arc90 31.76,21.65 19.85,21.65 18.58,21.65 arc90 15.25,18.32
+7V  (via drill 0.5)
  Top 0.254: C22.+ 22.23,2.92
  Top 0.406: IC2.14 40.21,27.24 40.73,27.76 40.22,28.21 IC2.13 | IC2.24 v31.28,28 | R9.2 31.28,19.27
  Top 0.61: v31.28,20.22 31.28,19.27 31.28,17.52 31.12,17.37
  Top 1.27: 28.9,8 28.9,16.25 30.01,17.37 31.12,17.37 40.49,17.37 43.19,20.06 43.19,25.3 40.73,27.76
  Top 1.422: 18.26,2.92 22.23,2.92 28.9,2.92 28.9,7.37 | 28.9,7.37 26.2,7.4 IC4.3 | 28.9,8 28.9,7.37 | C15.+ 18.26,2.92 | FUSE.1 3.83,6.93 | 3.83,6.93 7.84,2.92 18.26,2.92 | FUSE1.1 3.98,6.93 3.83,6.93
  Bottom 0.406: v31.28,28 v31.28,20.22
ADC_L
  Top 0.254: U$6.PC1 36.9,55.15 37.15,55.4
  Top 0.305: 37.15,55.4 38.51,56.76 38.51,58.29 39.18,58.96 51.12,58.96 55.97,63.8
  Top 0.406: R2.2 55.97,63.12 55.97,63.8 57.16,64.99 59.54,64.99 60.47,65.92 Q2.E
ADC_LF
  Top 0.254: 37.47,54.67 37.4,54.61 U$6.PC0
  Top 0.406: 37.47,54.67 39.22,56.42 42.07,56.42 42.71,57.05 52.55,57.05 55.33,59.83 | 55.33,59.83 56.04,60.55 59.7,60.55 60.81,61.66 60.97,61.82 61.72,62.57 Q1.E | R1.2 56.28,58.88 55.33,59.83
ADC_PA2
  Top 0.254: 33.15,50.74 U$6.PA2
  Top 0.406: 33.15,50.74 22.39,61.5 17.95,61.5 | 17.95,61.5 16.2,61.5 12.87,64.83 11.91,64.83 Q5.E | R23.2 18.01,61.57 17.95,61.5
ADC_PA3
  Top 0.254: 31.44,49.27 31.44,48.74 U$6.PA3
  Top 0.406: 31.44,49.27 31.44,51.34 23.7,59.07 R24.2 18.1,59.11 18.1,60.07 17.53,60.65 Q6.E
ADC_R
  Top 0.254: U$6.PC2 36.4,55.51 37.63,56.74 37.63,57.37
  Top 0.406: Q3.E 37.63,81.6 37.63,73.09 | R3.2 38.74,73.09 37.63,73.09 | 37.63,73.09 37.63,70.77 38.42,69.98 38.42,61.09 37.63,60.29 37.63,57.37
ADC_RF
  Top 0.254: 35.88,50.76 U$6.PC3 35.9,55.76 35.88,55.78 36.68,56.58 36.68,57.05
  Top 0.406: Q4.E 36.68,78.02 36.68,73.09 | R4.2 35.46,73.09 36.68,73.09 | 36.68,73.09 36.68,70.77 35.88,69.98 35.88,61.09 36.68,60.29 36.68,57.05
ADC_VBAT  (via drill 0.5)
  Top 0.254: v24.45,21.65 20.17,21.65 19.69,22.13 19.69,44.04 20.8,45.15 24.22,45.15 25.62,43.74 U$6.PB1
  Top 0.406: R9.1 28.9,21.65 29.06,21.81 | 29.06,21.81 29.85,22.6 R17.2 | 29.06,21.81 v28.74,22.29
  Bottom 0.406: v28.74,22.29 25.09,22.29 v24.45,21.65
AO1
  Top 0.305: IC7.AO 7.82,103.04 8.13,103.35 8.13,113.66 JP12.1
AO2
  Top 0.305: IC8.AO 66.5,102.49 66.19,102.18 66.19,91.87 JP4.1
BOOT0  (via drill 0.3)
  Top 0.254: v53.01,46.42 52.69,46.74 U$6.BOOT0 42.08,46.74 41.76,46.42 41.76,44.04 42.05,43.74 U$6.PD2 | R18.1 52.55,36.41 v52.55,38
  Bottom 0.254: v53.01,46.42 55.41,46.42 55.49,46.5 55.49,44.27 55.57,44.2 55.57,41.02 v52.55,38
BT_RXD  (via drill 0.3)
  Top 0.254: U$6.PA9 37.9,37.33 v37.79,37.21 | v48.42,32.29 48.27,32.29 48.27,18.95 50.96,16.25 58.11,16.25 SV1.8
  Bottom 0.254: v37.79,37.21 38.9,36.1 39.69,36.1 42.39,33.4 47.31,33.4 v48.42,32.29
BT_TXD  (via drill 0.3)
  Top 0.254: U$6.PA10 38.4,38.35 38.4,38.19 v38.74,37.84 | v53.98,30.38 54.3,30.7 R26.2
  Bottom 0.254: v38.74,37.84 38.74,37.05 39.06,36.73 39.85,36.73 42.39,34.19 49.85,34.19 53.66,30.38 v53.98,30.38
BTN  (via drill 0.3)
  Top 0.254: 13.97,36.58 14.13,36.58 | 14.13,36.58 15.25,36.58 17.79,34.04 17.79,29.43 | 17.79,29.43 17.79,26.89 16.99,26.1 15.56,26.1 14.77,25.3 14.77,23.24 v15.09,22.92 | v20.96,27.68 20.64,27.68 20.33,28 20.33,43.88 21.12,44.67 23.9,44.67 25.33,43.24 U$6.PB2 | v16.83,29.43 17.79,29.43 | R25.2 14.13,36.58 | BT1.3 6.03,16.25 8.89,16.25 v10.64,18
  Bottom 0.254: v10.64,18 10.64,19.59 13.98,22.92 v15.09,22.92 | v20.96,27.68 19.21,29.43 v16.83,29.43
BUZZER  (via drill 0.3)
  Top 0.254: IC1.7 23.66,49.27 23.66,50.23 24.45,51.02 25.56,51.02 26.04,50.55 v26.04,47.05 | U$6.PC5 29.44,44.74 28.92,44.22 26.33,44.22 26.04,44.51 v26.04,44.99
  Bottom 0.254: v26.04,44.99 v26.04,47.05
CHA1  (via drill 0.5)
  Top 0.305: IC7.A 8.48,100.44 9.66,101.62 9.66,110.74 10.65,111.73 v10.71,111.73
  Bottom 0.254: v10.71,111.73 10.71,111.78
  Bottom 0.305: 10.76,111.73 10.71,111.78 | v10.71,111.73 10.76,111.73 | 10.76,111.73 17.08,111.73 R34.2
CHA2  (via drill 0.5)
  Top 0.305: IC8.A 65.84,105.09 64.66,103.91 64.66,94.79 63.67,93.8 v63.62,93.8
  Bottom 0.254: v63.62,93.8 63.62,93.75
  Bottom 0.305: 63.56,93.8 63.62,93.75 | v63.62,93.8 63.56,93.8 | 63.56,93.8 57.24,93.8 R36.2
CHB1  (via drill 0.5)
  Top 0.305: IC7.B 7.17,101.75 7.99,101.75 8.67,102.44 8.67,112.66 v10.22,114.21 10.34,114.32
  Bottom 0.305: 10.29,114.27 v10.22,114.21 13.18,114.21 R35.1
CHB2  (via drill 0.5)
  Top 0.305: IC8.B 67.15,103.78 66.33,103.78 65.65,103.1 65.65,92.88 v64.1,91.33 63.98,91.21
  Bottom 0.305: 64.03,91.26 v64.1,91.33 61.14,91.33 R37.1
CS_A
  Top 0.254: U$6.PB4 44.39,44.74 47,42.13 47,18.64 50.81,14.83 50.81,12.76 53.5,10.06 U$1.P$2
CS_A1
  Top 0.254: ZAS1.3 50.97,127.46 51.61,126.82 51.61,126.19 52.57,125.23 U$2.P$10
CS_A2
  Top 0.254: ZAS2.3 4.57,127.36 5.21,126.72 5.21,126.09 6.17,125.13 U$3.P$10
CS_G
  Top 0.254: U$6.PB3 44.09,44.24 46.36,41.97 46.36,18.79 35.09,7.52 U$1.P$8
CS_G1
  Top 0.254: IC6.SPI_CS_B 66.3,125.51 arc45 66.37,125.54 66.83,125.54 67.86,126.57 67.86,129.6 68.26,130 SPI2.1
CS_G2
  Top 0.254: IC3.SPI_CS_B 19.9,125.41 arc45 19.97,125.44 20.43,125.44 21.46,126.47 21.46,129.5 21.86,129.9 SPI1.1
D_L  (via drill 0.3)
  Top 0.254: v19.21,52.45 18.74,51.97 IC1.3 | U$6.PA1 33.9,51.73 33.34,52.29 v33.18,52.29
  Bottom 0.254: v19.21,52.45 19.53,52.13 20.96,52.13 21.6,51.5 32.39,51.5 v33.18,52.29
D_LF  (via drill 0.3)
  Top 0.254: IC1.1 16.2,51.21 v16.52,51.53 | v39.63,52.91 39.4,52.68 U$6.PC15
  Bottom 0.254: v16.52,51.53 18.26,53.34 33.25,53.34 35.09,51.5 39.06,51.5 39.63,52.07 v39.63,52.91
D_LL  (via drill 0.3)
  Top 0.254: IC1.4 20.01,50.55 v20.17,50.7 | U$6.PC13 40.4,51.55 40.85,52 40.94,52 v40.96,51.97
  Bottom 0.254: v20.17,50.7 20.64,50.23 39.53,50.23 40.96,51.66 v40.96,51.97
D_R
  Top 0.254: 21.12,50.07 IC1.5 21.28,50.39 23.18,52.29 25.88,52.29 27.31,50.86 27.31,48.01 28.58,46.74 U$6.PA5
D_RF  (via drill 0.3)
  Top 0.254: IC1.6 22.55,50.39 23.82,51.66 25.72,51.66 26.68,50.7 26.68,47.53 v27.15,47.05 | U$6.PC4 29.15,45.24 28.9,44.99 v27.15,44.99
  Bottom 0.254: v27.15,44.99 v27.15,47.05
D_RR  (via drill 0.3)
  Top 0.254: v17.47,50.7 IC1.2 | U$6.PC14 39.9,51.95 40.45,52.5 v40.45,53.57 v40.46,53.57
  Bottom 0.254: v17.47,50.7 18.26,51.5 20.8,51.5 21.44,50.86 39.38,50.86 40.1,51.59 40.1,52.15 40.46,52.5 v40.46,53.57
ENCL_A
  Top 0.254: U$5.L_CHA 16.86,24.06 18.42,25.62 18.42,44.35 20.31,46.24 U$6.PA6
ENCL_B
  Top 0.254: U$5.L_CHB 19.06,23.8 19.06,44.2 20.6,45.74 U$6.PA7
ENCR_A
  Top 0.254: U$5.R_CHA 55.94,44.2 46.52,44.2 44.98,45.74 U$6.PB6
ENCR_B
  Top 0.254: U$5.R_CHB 57.22,44.83 46.68,44.83 45.27,46.24 U$6.PB7
GND  (via drill 0.3, 0.4, 0.5, 0.6)
  Top 0.254: 36.99,45.15 40.09,48.24 U$6.VSS_1 47.23,48.24 47.63,48.64 47.63,49.59 | 36.99,45.15 37.23,44.91 33.62,41.29 | 63.19,9.43 63.03,9.59 | 49.22,51.98 C_OSC1.1 | v48.42,36.58 50.01,36.58 51.28,35.3 51.28,34.19 51.5,33.97 R19.1 | 50.17,51.5 C_OSC1.1 | C22.- 22.23,7.52 | 11.75,38.48 11.91,38.32 R25.1 | VCAP_1.2 29.38,39.43 | 35.4,46.74 33.9,48.24 U$6.VSS_0 30.57,48.24 30.33,48.48 30.33,50.07 30.01,50.38 C_V1.2 | 35.4,46.74 U$6.VSSA 35.4,54.2 C_VSSA.2 34.61,55.47 34.65,55.43 | 35.4,46.74 36.99,45.15 | C_V2.2 47.63,49.59 | 47.63,49.59 C_OSC2.1 | 42.87,39.59 43.19,39.27 43.19,36.89 v42.87,36.58 | C2.2 52.07,51.18 50.49,51.18 C_OSC1.1 | RST_BTN.3 39.33,60.23 v38.48,59.39 | 34.65,55.43 34.65,55.3 | 34.65,55.43 34.65,55.7 35.75,56.8 35.75,58.42 35.55,58.62 v35.75,58.62 35.38,59 33.01,59 C_VSSA1.- | U$1.P$4 v55.73,15.14
  Top 0.305: 62.08,10.54 63.03,9.59 | LED1.C 63.19,6.41 63.19,9.43 | C_OSC2.1 48.27,49.59 | C_OSC2.1 | C_OSC1.1 48.74,51.03 C_OSC2.1 | C12.2 28.42,24.35 28.66,24.11 | 42.87,39.59 37.55,44.91 37.23,44.91 | VCAP_2.2 43.66,33.56 43.66,34.35 42.24,35.78 C_V3.2 42.11,35.82 v42.87,36.58
  Top 0.406: IC2.18 37.61,26.39 36.84,25.62 30.8,25.62 | 30.8,25.62 30.17,25.62 28.66,24.11 25.09,20.54 20.96,20.54 18.9,18.48 17.15,18.48 | 33.62,41.29 33.5,41.18 33.34,41.18 | R17.1 30.96,25.46 30.8,25.62 | v23.34,7.05 22.23,7.05 22.14,7.14 IC4.1 | 62.08,10.54 SV1.4 | C13.- 57.49,24.1 U$5.R_GND | R24.1 v10.37,59.07 | R4.1 35.36,76.95 v29.69,82.61 | R3.1 38.9,76.9 v44.61,82.61 | R2.1 61.25,64.52 v65.62,64.52 | 17.92,64.99 16.83,64.99 v13.34,68.48 | 29.38,39.43 29.03,39.43 | 28.9,39.43 29.03,39.43 | 29.03,39.43 29.03,39.5 24.45,39.5 24.45,39.24 24.96,39.24 24.96,38.23 28.9,38.23 v28.9,36.58
  Top 0.61: IC5.GND 23.38,34.67 | C21.- 11.75,28 | 17.92,64.99 R23.1 18.02,65.09 | R2.1 58.86,62.57 | v66.36,58.96 66.45,58.88 R1.1 58.74,58.84 58.27,58.37 58.27,50.55 59.54,49.27 C3.-
  Top 0.813: 33.34,41.18 31.6,39.43 29.38,39.43 28.9,39.43 22.71,39.43 22.57,39.3 | R14.1 22.23,9.75 | 22.64,39.46 22.57,39.3 | v22.1,39.27 22.57,39.3 | v11.75,40.23 12.31,39.67 12.63,39.67
  Top 1.016: 22.23,7.05 22.23,7.52 22.23,9.75 22.23,10.22 17.15,15.3 17.15,18.48 11.75,23.88 11.75,28 11.75,38.48 11.75,38.8 12.63,39.67 15.56,42.6 U$5.L_GND
  Bottom 0.254: v48.42,36.58 v42.87,36.58 | v38.48,59.39 37.67,58.62 v35.75,58.62
  Bottom 0.406: 60.01,10.54 60.01,21.58 U$5.R_GND 57.5,24.03 56.2,24.03 55.57,23.4 55.57,21.02 56.2,20.38 56.2,15.14 | 16.36,42.6 U$5.L_GND | v23.34,7.05 24.14,7.05 26.48,4.7 45.44,4.7 46.2,5.46 54.46,5.46 56.2,7.21 56.2,15.14 | 60.01,10.54 SV1.3 | SV1.4 60.01,10.54 | v55.73,15.14 56.2,15.14 | v10.37,59.07 8.38,59.07 8.26,58.96 | v65.62,64.52 67.79,64.52 67.95,64.36 | v29.69,82.61 28.1,84.2 27.63,84.2 | v44.61,82.61 45.88,83.88 45.88,84.2 | v13.34,68.48 12.23,69.59 12.23,69.91 | v28.9,36.58 28.95,36.58 28.95,36.7
  Bottom 0.61: v66.36,58.96 67.95,60.55 67.95,60.95
  Bottom 0.813: U$5.L_GND 20.11,39.27 v22.1,39.27 | 9.37,53.4 10.8,51.97 10.8,41.18 v11.75,40.23
  Bottom 1.016: 9.37,53.4 8.26,54.51 8.26,58.96 8.26,65.94 12.23,69.91 26.52,84.2 27.63,84.2 45.88,84.2 48.11,84.2 67.79,64.52 | 67.95,64.36 67.95,60.95
  other vias: 30.17,36.58 30.17,35.3 30.17,34.04 30.17,32.77 28.9,32.77 28.9,34.04 28.9,35.3
  pour Top (isolate 0.305, no thermals): 25.26,38.66 25.27,39.57 22.51,39.12 22.51,26.2 32.04,26.5 32.05,27.5 32.15,31.1 33.34,38.64
  pour Bottom: 20.01,39.12 20.01,25.3 31.64,25.2 36.04,39.27
  pour Top: 30.33,50.07 30.65,50.07 30.75,40.9 32.33,40.9 33.19,39.75 43.98,39.75 44.14,39.91 44.14,50.7 42.87,51.49 31.12,51.49
GND1  (via drill 0.3)
  Top 0.254: IC3.GND3 arc45 IC3.GND3 21.06,123.9 v21.63,123.78 | IC3.GND1 15.27,127.56 | IC3.GND4 19.06,126.97 18.72,127.31 | U$3.P$16 9.72,122.22 v9.84,122.1 | IC3.GND2 14.41,124.41 v13.97,123.97 | IC3.RGND2 16.66,122.4 16.33,122.07 | IC3.RGND3 17.16,122.47 17.09,122.38 | U$3.P$5 11.67,125.63 v11.98,125.94 | U$3.P$12 7.18,124.13 6.88,123.83 6.88,123.6 arc-90 6.91,123.63 U$3.P$13 | U$3.P$3 11.5,124.63 12.37,123.75
  other vias: 17.95,120.53 6.41,121.64 22,132.87 10.97,131.5 23.85,132.26 20.36,120.69 23.18,119.88 10.99,119.61 12.45,121.76 18.26,131.75
  pour Top (isolate 0.305): 0.38,133.54 27.97,133.64 27.87,118.63 0.28,118.53
  pour Bottom (isolate 0.203): 0.44,133.64 27.97,133.64 27.87,118.63 0.34,118.63
GND3  (via drill 0.4)
  other vias: 8.66,91.79 6.76,93.7 8.66,98.14 6.12,107.67 6.12,111.48 3.58,110.21 3.58,107.67 11.57,113.07 15.79,92.2 12.05,92.66
  pour Top (isolate 0.254): 0.15,95.66 0.15,110.21 6.74,115.71 31.24,115.76 31.36,110.32 10.56,110.32 10.56,94.92 31.36,95.02 31.36,89.62 6.76,89.52 0.12,95.66
  pour Bottom (isolate 0.305): 6.78,89.56 0.18,95.68 0.14,110.18 0.16,110.22 6.76,115.72 31.16,115.72 31.16,110.32 10.56,110.32 10.56,94.92 31.34,94.92 31.34,89.46
GND4  (via drill 0.4)
  other vias: 65.66,113.74 67.56,111.84 65.66,107.39 68.2,97.87 68.2,94.06 70.74,95.33 70.74,97.87 62.75,92.47 58.53,113.33 62.27,112.88
  pour Top (isolate 0.254): 74.17,109.88 74.17,95.32 67.58,89.82 43.08,89.78 42.96,95.22 63.76,95.22 63.76,110.62 42.96,110.52 42.96,115.92 67.56,116.02 74.2,109.88
  pour Bottom (isolate 0.305): 67.54,115.98 74.14,109.86 74.18,95.36 74.16,95.32 67.56,89.82 43.16,89.82 43.16,95.22 63.76,95.22 63.76,110.62 42.98,110.62 42.98,116.08
GND5  (via drill 0.3)
  Top 0.254: IC6.GND3 arc45 IC6.GND3 67.46,124 v68.03,123.88 | IC6.GND1 61.67,127.66 | IC6.GND4 65.46,127.07 65.12,127.41 | U$2.P$16 56.12,122.32 v56.24,122.2 | IC6.GND2 60.81,124.51 v60.37,124.07 | IC6.RGND2 63.06,122.5 62.73,122.17 | IC6.RGND3 63.56,122.57 63.49,122.48 | U$2.P$5 58.07,125.73 v58.38,126.04 | U$2.P$12 53.58,124.23 53.28,123.93 53.28,123.7 arc-90 53.31,123.73 U$2.P$13 | U$2.P$3 57.9,124.73 58.77,123.85
  other vias: 64.35,120.63 52.81,121.74 68.4,132.97 57.37,131.6 70.25,132.36 66.76,120.79 69.58,119.98 57.39,119.71 58.85,121.86 64.66,131.85
  pour Top (isolate 0.305): 46.78,133.64 74.37,133.74 74.27,118.73 46.68,118.63
  pour Bottom (isolate 0.203): 46.84,133.74 74.37,133.74 74.27,118.73 46.74,118.73
GNDA  (via drill 0.4, 0.5)
  Top 0.406: IC2.3 35.01,19.5 v34.61,19.11 | IC2.4 35.66,19.34 v35.88,19.11 | IC2.9 38.91,19.44 v38.58,19.11 | IC2.10 39.56,19.41 v39.85,19.11 | 11.99,42.85
  Top 0.61: 15.08,46.02 15.35,46.27 15.96,46.81
  Top 0.813: IC1.8 25.09,47.85 24.45,47.21 16.36,47.21 15.96,46.81 11.99,42.85 10.32,41.18 10.32,20.86 JP1.1 | R14.2 18.45,9.75 C15.- | 15.35,46.27 15.15,46.27 C6.- 13.57,49.36 C1.2
  Top 1.422: 18.26,9.91 C15.- 14.59,13.56 JP1.3
  Bottom 0.406: v34.61,19.11 34.61,18.48 | v35.88,19.11 35.88,18.48 | v38.58,19.11 38.58,18.48 | v39.85,19.11 39.69,19.11 39.06,18.48
  Bottom 1.422: 17.95,13.56 17.95,15.14 15.25,18 14.61,18.64 JP1.1 | 17.95,13.56 17.95,9.11 33.82,9.27 34.61,10.06 34.61,18.48 | JP1.3 17.95,13.56
  Bottom 1.676: 34.61,18.48 35.88,18.48 38.58,18.48 39.06,18.48
  other vias: 40.65,25.78 41.28,24.83
  pour Bottom (isolate 0.305, no thermals): 33.03,31.18 32.07,30.22 32.07,18.64 33.03,17.68 50.17,17.68 50.01,31.18
  pour Top (isolate 0.305, no thermals): 32.27,26.48 32.07,18 31.92,17.84 43.82,17.84 45.89,19.91 45.89,28.16 42.61,27.94 33.24,27.94 32.29,27.68
INT_A  (via drill 0.3)
  Top 0.254: v47.95,40.07 47.63,39.75 47.63,18.79 53.82,12.6 U$1.P$3 | v32.87,44.2 32.82,44.24 U$6.PB0
  Bottom 0.254: v47.95,40.07 46.36,41.66 33.66,41.66 32.87,42.45 v32.87,44.2
INT_A1
  Top 0.254: U$2.P$11 53.17,124.73 52.67,124.23 52.67,123.01 52.37,122.71 51.67,122.71 R33.1
INT_A2
  Top 0.254: U$3.P$11 6.77,124.63 6.28,124.13 6.28,122.91 5.97,122.61 5.27,122.61 R39.1
LED1
  Top 0.254: U$6.PB9 58.06,47.74 59.7,46.1 59.7,21.33 65.25,15.78 65.25,10.22 65.73,9.75 LED2.C
LED2
  Top 0.254: U$6.PB8 57.76,47.24 59.06,45.94 59.06,21.18 64.62,15.62 64.62,7.56 65.73,6.44 LED3.C
LED3  (via drill 0.3)
  Top 0.254: U$6.PB5 44.75,45.24 46.81,43.18 49.47,43.18 v49.6,43.31 | v57.06,52.07 57.06,56.16 56.08,57.15 v55.31,57.15 | v51.16,60.42 50.38,61.2 LED4.C
  Bottom 0.254: v49.6,43.31 52.27,45.97 52.27,46.99 52.52,47.24 56.04,47.24 57.06,48.26 v57.06,52.07 | v55.31,57.15 54.43,57.15 v51.16,60.42
LED5
  Top 0.254: U$6.PA0_WKUP 34.4,52.15 33.47,53.09 31.95,53.09 23.91,61.12 LED6.C
MISO  (via drill 0.5)
  Top 0.254: v37.31,13.87 39.85,13.87 45.09,19.11 45.09,41.66 44.01,42.74 U$6.PC11 | U$1.P$7 35.88,10.06 v37.31,11.49
  Bottom 0.254: v37.31,13.87 v37.31,11.49
MISO1  (via drill 0.3)
  Top 0.254: U$2.P$7 arc45 55.63,126.26 55.63,126.94 56,127.3 arc-45 56.07,127.33 58.97,127.33 v58.97,127.71 | IC6.SA0/MISO 66.73,123.51 v67.08,123.16 | v67.31,130.63 66.68,131.25 R31.2
  Bottom 0.254: v67.08,123.16 65.93,124.31 65.93,127.74 | v58.97,127.71 65.91,127.71 65.93,127.74 | 65.93,127.74 65.55,128.12 65.55,129.11 67.08,130.63 v67.31,130.63
MISO2  (via drill 0.3)
  Top 0.254: U$3.P$7 arc45 9.23,126.16 9.23,126.84 9.6,127.2 arc-45 9.67,127.23 12.57,127.23 v12.57,127.61 | IC3.SA0/MISO 20.34,123.41 v20.68,123.06 | v20.91,130.53 20.28,131.15 R29.2
  Bottom 0.254: v20.68,123.06 19.53,124.21 19.53,127.64 | v12.57,127.61 19.51,127.61 19.53,127.64 | 19.53,127.64 19.15,128.02 19.15,129.01 20.68,130.53 v20.91,130.53
ML_IN1
  Top 0.254: IC2.22 35.01,29.2 33.03,31.18 33.03,35.3 35.4,37.68 U$6.PC6
ML_IN2
  Top 0.254: IC2.21 35.66,29.34 33.66,31.34 33.66,35.15 35.91,37.39 35.9,37.4 U$6.PC7
ML_PWM
  Top 0.254: IC2.23 34.36,29.05 32.39,31.02 32.39,36.89 33.5,38 33.98,38 34.41,38.44 34.4,38.44 U$6.PB14
MOSI
  Top 0.254: U$6.PC12 44.3,43.24 45.73,41.81 45.73,18.95 39.38,12.6 U$1.P$6
MOSI1  (via drill 0.3)
  Top 0.254: U$2.P$6 arc-45 U$2.P$6 56.12,126.61 56.3,126.79 arc-45 56.37,126.82 59.06,126.82 59.53,126.35 v59.53,125.91 | SPI2.3 69.91,124.92 69.49,124.5 69.49,123.32 68.54,122.36 v67.96,122.36 64.88,122.36 64.56,122.68 IC6.SDA/MOSI
  Bottom 0.254: 59.53,123.41 60.57,122.36 v67.96,122.36
  Bottom 0.3: v59.53,125.91 59.53,123.41
MOSI2  (via drill 0.3)
  Top 0.254: U$3.P$6 arc-45 U$3.P$6 9.72,126.51 9.9,126.69 arc-45 9.97,126.72 12.66,126.72 13.13,126.25 v13.13,125.81 | SPI1.3 23.51,124.82 23.09,124.4 23.09,123.22 22.14,122.27 v21.56,122.27 18.48,122.27 18.16,122.58 IC3.SDA/MOSI
  Bottom 0.254: 13.13,123.31 14.17,122.27 v21.56,122.27
  Bottom 0.3: v13.13,125.81 13.13,123.31
MR_IN1
  Top 0.254: IC2.17 38.27,29.27 36.52,31.18 36.52,35.3 36.39,35.43 36.4,35.44 U$6.PC8
MR_IN2
  Top 0.254: IC2.16 38.91,29.43 37.15,31.18 37.15,35.46 36.9,35.72 U$6.PC9
MR_PWM  (via drill 0.3)
  Top 0.254: v33.5,36.89 33.82,36.89 34.9,37.98 U$6.PB15 | v37.79,36.1 37.79,31.34 39.56,29.57 IC2.15
  Bottom 0.254: v33.5,36.89 36.36,36.89 37.15,36.1 v37.79,36.1
N$1
  Top 0.406: R16.1 23.34,32.04 IC5.PWRGD
N$2  (via drill 0.5)
  Top 0.61: IC1.15 v17.47,57.37
  Bottom 0.61: v17.47,57.37 17.47,59.75 20.33,62.61 20.33,66.26 20.33,66.42 20.33,66.62 D5.KATODA
N$3
  Top 0.61: R15.1 20.49,73.41 18.02,70.94 17.79,70.71 17.4,70.32 D5.ANODA
N$4
  Top 0.61: R5.1 59.38,53.56 59.38,56.26 60.21,57.09 D1.ANODA
N$5  (via drill 0.5)
  Top 0.406: IC2.8 38.26,21.8 38.58,22.13 v39.06,22.13 | IC2.7 37.61,21.79 v37.95,22.13
  Bottom 1.016: v37.95,22.13 37.95,23.24 37.31,23.88 | v39.06,22.13 39.06,22.74 37.3,24.5
  Bottom 1.27: 38.58,34.67 37.15,33.24 37.3,24.5 37.31,23.88
  Bottom 1.676: U$5.R_MOTOR_B 39.09,34.67 38.58,34.67
N$6  (via drill 0.5)
  Top 0.406: IC2.12 40.86,21.07 41.44,21.65 v41.44,22.13 | IC2.11 40.21,22.01 v40.33,22.13
  Bottom 0.406: v41.44,22.13 41.44,22.29 | 40.49,23.24 40.57,23.16 40.65,23.08 40.73,23 40.57,22.84 40.33,22.6
  Bottom 1.016: 41.44,22.29 40.65,23.08 | v40.33,22.13 40.33,22.92 40.57,23.16
  Bottom 1.27: U$5.R_MOTOR_A 39.15,24.89 40.57,23.48 40.57,22.84
N$7  (via drill 0.5)
  Top 0.406: 33.71,20.97 IC2.1 32.71,21.75 v32.71,22.13 | IC2.2 34.36,21.59 v33.82,22.13
  Bottom 1.016: v32.71,22.13 32.71,23.08 32.87,23.08 v33.82,22.13
  Bottom 1.27: 34.39,34.6 32.71,32.92 32.71,23.08
  Bottom 1.676: U$5.L_MOTOR_A 34.39,34.6
N$8  (via drill 0.4, 0.5)
  Top 0.305: R10.1 50.01,2.6 v50.01,3.55 | LED3.A v68.56,6.7
  Bottom 0.305: v50.01,3.55 61.92,3.55 65.06,6.7 v68.56,6.7
N$9
  Bottom 1.422: JP1.2 11.6,16.1 10.64,15.14 10.64,10.54 12.55,8.63 ZAS.1
N$10
  Top 0.61: R6.1 13.02,52.75 13.02,54.13 D2.ANODA
N$11
  Top 0.61: R7.1 47.47,73.41 43.82,77.06 41.66,77.06 D3.ANODA
N$12
  Top 0.61: D4.ANODA 54.4,71.56 52.5,73.46 R8.1
N$13
  Top 0.61: IC1.16 14.62,57.1 D2.KATODA
N$14  (via drill 0.5)
  Top 0.61: IC1.10 v23.82,57.38
  Bottom 0.61: v23.82,57.38 26.68,60.39 42.39,60.39 48.27,54.51 60.76,54.51 D1.KATODA
N$15  (via drill 0.5)
  Top 0.61: IC1.13 v20.01,57.37
  Bottom 0.61: v20.01,57.37 20.01,59.12 24.77,63.88 34.39,63.88 35.82,65.31 35.82,71.75 38.27,74.2 42.38,74.2 D3.KATODA
N$16  (via drill 0.5)
  Top 0.61: IC1.11 v22.55,57.38
  Bottom 0.61: v22.55,57.38 22.55,58.32 26.04,61.5 53.03,61.5 56.9,65.37 D4.KATODA
N$17
  Top 0.305: LED1.A R12.1
N$18  (via drill 0.5)
  Top 0.406: IC2.5 36.31,21.86 36.04,22.13 v35.41,22.13 | v36.52,22.13 36.96,21.69 IC2.6
  Bottom 1.016: v36.52,22.13 36.52,22.35 35.15,23.72 | v35.41,22.13 35.15,22.38 35.15,23.33
  Bottom 1.27: U$5.L_MOTOR_B 35.15,23.72 35.15,23.33
N$19  (via drill 0.5)
  Top 0.61: IC1.12 v21.28,57.37
  Bottom 0.61: v21.28,57.37 21.28,58.8 25.25,62.77 35.88,62.77 37.2,64.09 BUZ1.-
N$20
  Top 0.61: R22.1 31.02,73.43 D6.ANODA
N$21  (via drill 0.4, 0.5)
  Top 0.305: R13.1 47.47,2.45 v47.47,3.55 | LED2.A v68.46,9.75
  Bottom 0.305: v47.47,3.55 48.58,2.44 62.55,2.44 65.73,5.62 69.38,5.62 70.17,6.41 70.17,8 69.22,8.95 v68.46,9.75
N$22
  Top 0.254: LED4.A 50.44,66.66 R20.1
N$23  (via drill 0.3)
  Top 0.254: R19.2 54.3,35.14 | 54.3,35.14 54.3,35.15 v58.11,35.15 | 54.3,35.14 R18.2 | v60.65,35.15 64.14,31.65 v64.14,18.98 | BT0.1 67.21,14.93 v66.22,14.93
  Bottom 0.254: v58.11,35.15 v60.65,35.15 | v66.22,14.93 64.85,16.2 64.15,16.9 64.15,18.4 64.14,18.41 v64.14,18.98
N$24
  Top 1.27: 3.18,10.21 2.97,10 FUSE.2 | FUSE1.2 5.02,9.87 5.02,10.21
  Top 1.422: ZAS.2 5.57,10.21 5.02,10.21 3.18,10.21
N$25
  Top 0.254: U$3.P$8 8.72,127.33 arc-45 8.75,127.41 9.03,127.69 11.28,127.69 11.99,128.4 C4.1
N$26  (via drill 0.3)
  Top 0.254: R26.1 v52.39,30.38 | v49.22,33.4 49.22,31.81 48.9,31.49 48.9,19.11 51.12,16.89 59.38,16.89 60.01,16.25 60.01,14.83 58.74,13.56 SV1.6
  Bottom 0.254: v49.22,33.4 52.23,30.38 v52.39,30.38
N$27
  Top 0.254: U$3.P$2 11.33,124.12 11.63,123.81 11.63,121.97 9.78,120.11 C23.2
N$28
  Top 0.254: U$2.P$8 55.12,127.43 arc-45 55.15,127.5 55.43,127.79 57.68,127.79 58.39,128.5 C7.1
N$29  (via drill 0.3)
  Top 0.254: BT1.1 v3.47,16.25 | R11.2 13.82,25.62 v13.34,25.14
  Bottom 0.254: v3.47,16.25 8.9,16.25 9.69,17.05 9.69,21.49 v13.34,25.14
N$30
  Top 0.254: U$2.P$2 57.73,124.22 58.03,123.91 58.03,122.07 56.17,120.21 C9.2
N$31
  Top 0.254: R27.1 23.95,69.23 23.95,66.76 LED6.A
N$32  (via drill 0.3)
  Top 0.254: v68.83,129.06 68.83,127.69 68.46,127.32 68.46,126.42 67.05,125.01 IC6.VREGD | C8.1 62.27,132.08 62.96,132.77 v63.11,132.77
  Bottom 0.254: v68.83,129.06 68.83,130.4 66.47,132.77 v63.11,132.77
N$33  (via drill 0.5)
  Top 0.61: IC1.14 v18.74,57.37
  Bottom 0.61: v18.74,57.37 18.74,59.44 22.07,62.77 22.07,69.59 30.01,77.53 32.17,77.53 D6.KATODA
N$35
  Top 0.254: IC6.RST_B 60.19,125.01 59.58,124.4 59.58,123.63 60.21,123.01 R30.1
N$36  (via drill 0.3)
  Top 0.254: R31.1 66.09,128.96 v66.54,128.5
  Bottom 0.254: v66.54,128.5 67.59,127.46 SPI2.2
N$37
  Top 0.254: R32.2 INT_G2.1
N$38
  Top 0.254: IC6.INT1 60.93,125.51 60.29,126.14 R32.1 60.68,127.95
N$39
  Top 0.254: ZAS1.2 50.55,124.92 51,124.47 R33.2
N$40
  Bottom 0.305: R34.1 19.54,111.78 JP11.1
N$41
  Bottom 0.305: JP11.2 15.45,114.32 R35.2
N$42
  Bottom 0.305: R36.1 54.78,93.75 JP3.1
N$43
  Bottom 0.305: JP3.2 58.87,91.21 R37.2
N$44  (via drill 0.3)
  Top 0.254: v22.43,128.96 22.43,127.59 22.06,127.22 22.06,126.32 20.65,124.91 IC3.VREGD | C5.1 15.87,131.98 16.56,132.67 v16.71,132.67
  Bottom 0.254: v22.43,128.96 22.43,130.3 20.07,132.67 v16.71,132.67
N$46
  Top 0.254: IC3.RST_B 13.79,124.91 13.18,124.3 13.18,123.53 13.81,122.91 R28.1
N$47  (via drill 0.3)
  Top 0.254: R29.1 19.69,128.86 v20.14,128.4
  Bottom 0.254: v20.14,128.4 21.19,127.36 SPI1.2
N$48
  Top 0.254: R38.2 INT_G1.1
N$49
  Top 0.254: IC3.INT1 14.53,125.41 13.9,126.04 R38.1 14.28,127.85
N$50
  Top 0.254: ZAS2.2 4.15,124.82 4.6,124.37 R39.2
OSC_IN  (via drill 0.3)
  Top 0.254: 42.54,51.82 Q7.3 | Q7.3 43.38,51.85 43.03,51.85 43.03,52.29 v45.25,52.29 | v51.28,52.77 50.49,53.56 50.01,53.56 C_OSC1.2 | Q7.3 42.14,52.29 42.14,52.32 41.25,53.2 41.25,53.9 40.65,54.5 39.84,54.5 38.9,53.57 U$6.PH0
  Bottom 0.254: v45.25,52.29 50.81,52.29 v51.28,52.77
OSC_OUT  (via drill 0.3)
  Top 0.254: U$6.PH1 38.4,51.78 38.4,51.79 38.4,53.85 39.79,55.24 45.82,55.24 Q7.1 44.99,54.09 v44.46,53.56
  Top 0.305: 47.03,54.2 Q7.1 | C_OSC2.2 v51.92,49.59
  Bottom 0.254: v51.92,49.59 45.57,49.59 44.3,50.86 44.3,53.4 v44.46,53.56
RST  (via drill 0.3)
  Top 0.254: U$6.NRST 37.9,54.15 39.53,55.78 43.5,55.78 43.66,55.94 v43.66,56.1 43.98,55.78 46.36,55.78 46.84,55.31 54.14,55.31 54.14,53.88 | 53.03,53.88 C2.1 54.14,53.88 | R21.1 54.14,53.88 | v41.12,57.67 41.1,57.69 RST_BTN.1
  Bottom 0.254: v43.66,56.1 42.09,57.67 v41.12,57.67
SCLK
  Top 0.254: U$6.PC10 43.71,42.24 44.46,41.5 44.46,19.27 40.33,15.14 U$1.P$5
SCLK1  (via drill 0.3)  (1 unrouted)
  Top 0.254: U$2.P$4 arc-45 U$2.P$4 58.41,125.23 v58.72,124.99 | IC6.SCL/SCLK 64.05,122.16 64.54,121.67 | 64.54,121.67 arc-45 64.56,121.63 68.58,121.63 69.32,122.38 SPI2.4 | 64.54,121.67 64.56,121.65 64.58,121.65 64.55,121.63 v63.41,121.63
  Bottom 0.254: 58.72,124.85 v58.72,124.99 58.72,123.52 60.61,121.63 v63.41,121.63
SCLK2  (via drill 0.3)  (1 unrouted)
  Top 0.254: U$3.P$4 arc-45 U$3.P$4 12.01,125.13 v12.32,124.89 | 17.65,123.15 17.65,122.06 18.14,121.57 | 18.14,121.57 arc-45 18.16,121.53 22.17,121.53 22.92,122.28 SPI1.4 | 18.14,121.57 18.16,121.55 18.17,121.55 18.15,121.53 v17.01,121.53
  Bottom 0.254: 12.32,124.75 v12.32,124.89 12.32,123.42 14.21,121.53 v17.01,121.53
SWCLK  (via drill 0.3)
  Top 0.254: v49.38,35.78 49.7,35.78 50.65,34.83 50.65,31.49 50.17,31.02 50.17,19.43 51.44,18.16 61.28,18.16 63.35,16.1 63.35,13.24 61.92,11.81 60.65,11.81 60.01,12.45 60.01,13.56 61.28,14.83 SV1.7 | U$6.PA14 43.6,41.24 43.82,41.02 43.82,35.78 v43.66,35.78
  Bottom 0.254: v43.66,35.78 v49.38,35.78
SWDIO  (via drill 0.3)
  Top 0.254: v48.42,34.99 49.54,34.99 50.01,34.51 50.01,31.65 49.54,31.18 49.54,19.27 51.28,17.52 61.12,17.52 62.71,15.94 62.71,14.51 SV1.5 | 39.9,37.96 39.9,37.97 | 39.9,37.97 U$6.PA13 | v40.01,37.53 39.9,37.48 39.9,37.97
  Bottom 0.254: v48.42,34.99 42.39,34.99 v40.01,37.53
VCAP_1
  Top 0.254: VCAP_1.1 29.61,41.74 U$6.VCAP_1
VCAP_2
  Top 0.254: U$6.VCAP_2 40.4,38.41 40.8,38 40.8,36.89
  Top 0.305: VCAP_2.1 40.8,33.56 40.8,36.89
VCC1  (via drill 0.4)
  Top 0.305: IC7.VDDA 2.84,102.39 2.84,102.61 3.92,103.69 IC7.VDD | IC7.VDDP 3.25,101.09 2.84,100.68
  Top 0.406: v2.84,98.14 2.84,100.68 2.84,102.39 | v8.11,95.26 9.93,93.45 9.93,92.43 11.38,90.98 JP10.1
  Bottom 0.305: v2.84,98.14 | C17.1 2.87,96.55 | C18.1 6.58,95.26
  Bottom 0.406: C17.1 v2.84,98.14 | 2.87,96.55 2.87,95.72 3.31,95.27 C18.1 | 6.58,95.26 v8.11,95.26
VCC2  (via drill 0.4)
  Top 0.305: IC8.VDDA 71.48,103.15 71.48,102.92 70.4,101.84 IC8.VDD | IC8.VDDP 71.07,104.44 71.48,104.85
  Top 0.406: v71.48,107.39 71.48,104.85 71.48,103.15 | v66.21,110.27 64.39,112.09 64.39,113.11 62.94,114.55 JP2.1
  Bottom 0.305: v71.48,107.39 | C19.1 71.45,108.98 | C20.1 67.74,110.27
  Bottom 0.406: C19.1 v71.48,107.39 | 71.45,108.98 71.45,109.82 71.01,110.26 C20.1 | 67.74,110.27 v66.21,110.27
VDDIO1
  Top 0.254: IC3.VDDIO 19.78,125.91 20.07,126.19 20.07,126.88 18.95,127.99 18.16,127.99 17.78,128.37 C27.2 17.78,129.16
VDDIO2
  Top 0.254: IC6.VDDIO 66.18,126.01 66.47,126.29 66.47,126.97 65.35,128.09 64.56,128.09 64.18,128.47 C16.2 64.18,129.26